# EAGLE board PIC32board (EAGLE 8.1.0)
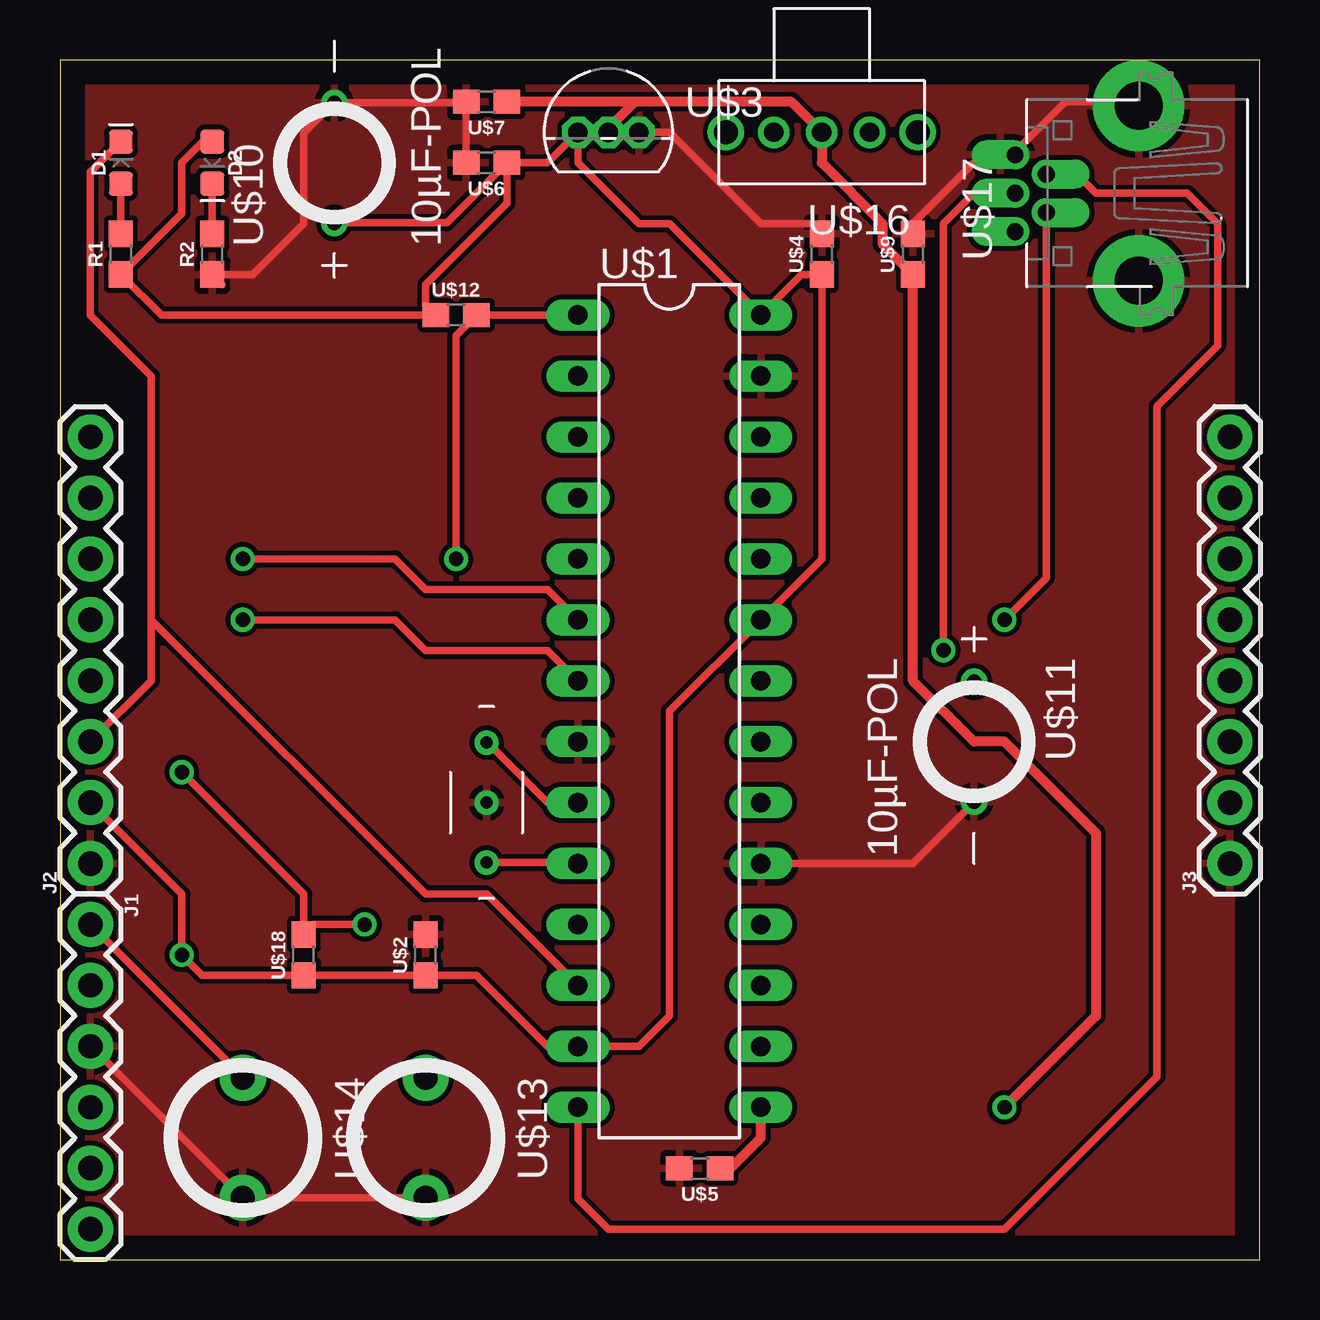
[diagram p0: board, top side]
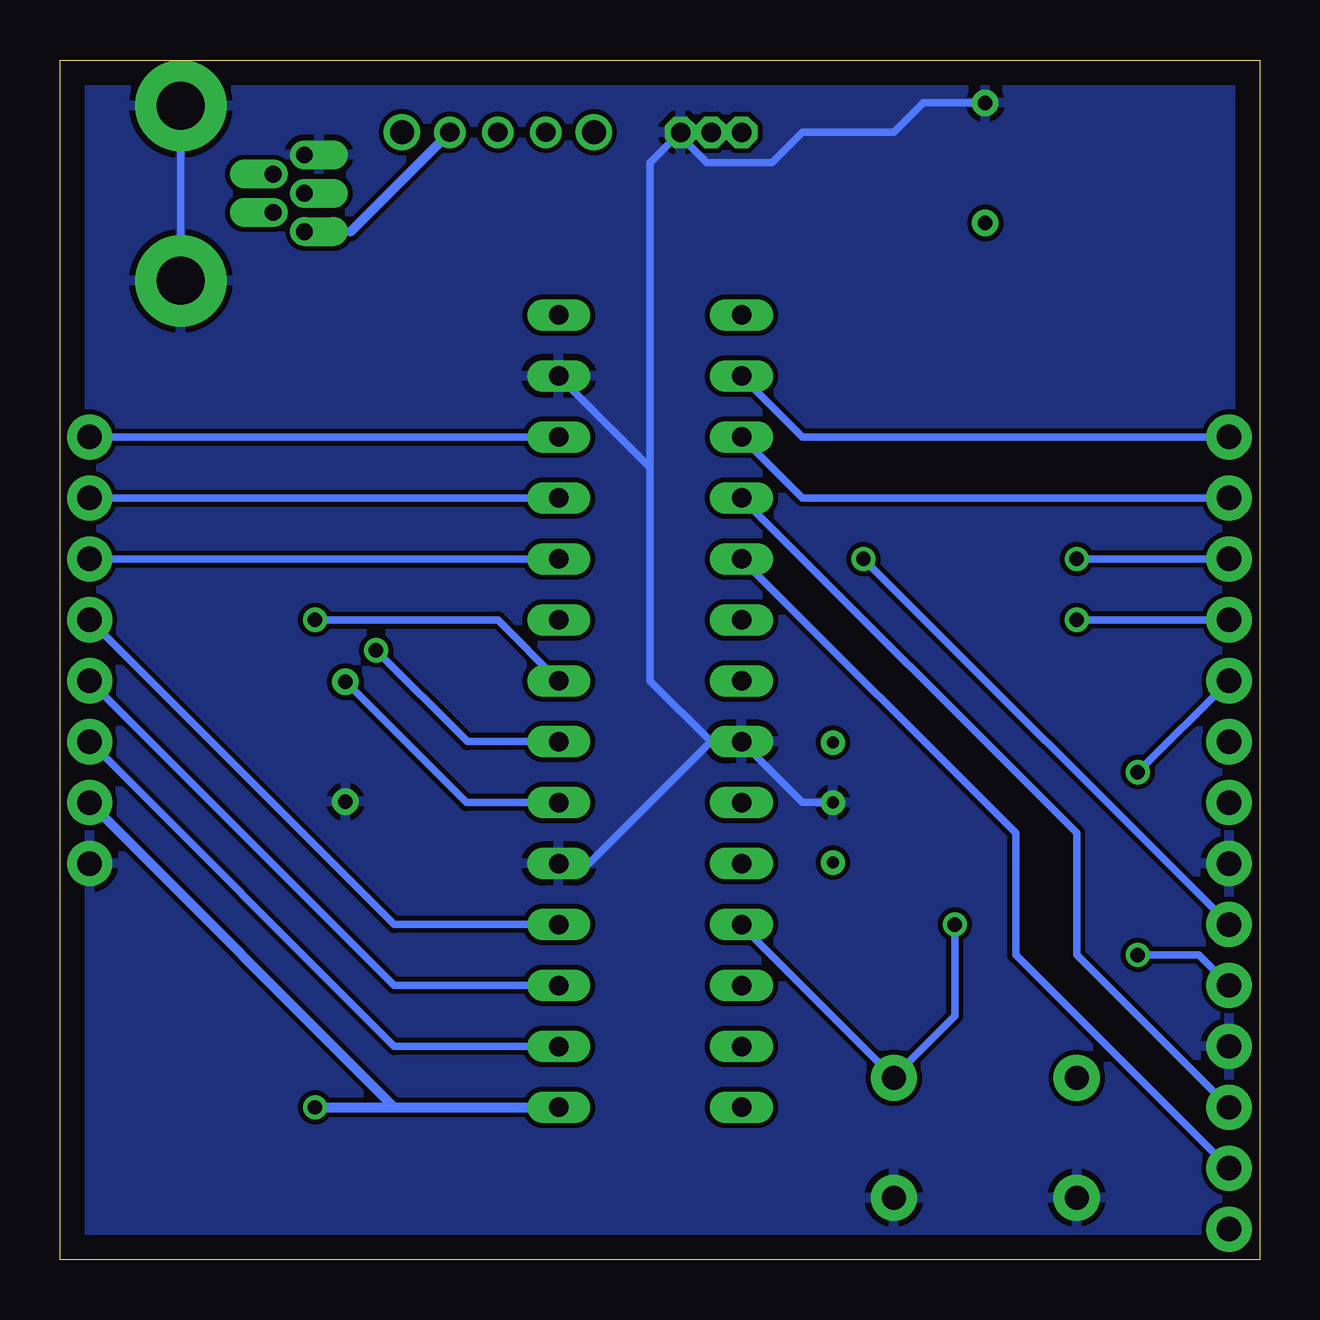
[diagram p1: board, bottom side, seen from below]

Size 50 x 50 mm. Coordinates in mm from the lower left corner, seen from the top.
Outline: 0,0 50,0 50,50 0,50 0,0
Copper layers (1*16): Top 0.035mm / dielectric 1.5mm / Bottom 0.035mm
Design rules "default": minimum track width 10mil, minimum drill 24mil, track to track 8mil, track to pad 8mil, pad to pad 8mil, via to via 8mil, smd to smd 8mil, copper to edge 40mil, drill to drill 8mil, minimum pad ring 10mil, minimum via ring 8mil, stop-mask expansion 4mil, vias tented up to drill 0mil, thermal gap 10mil

## Footprints (pad centres in the part's own frame; a part is rotated, then mirrored left to right if it is on the bottom)
LED-0603 = smd 1 x 1: A -0.877,0; C 0.877,0
1X06 = drill 1.016 pad 1.88: 1 0,0; 2 2.54,0; 3 5.08,0; 4 7.62,0; 5 10.16,0; 6 12.7,0
1X08 = drill 1.016 pad 1.88: 1 0,0; 2 2.54,0; 3 5.08,0; 4 7.62,0; 5 10.16,0; 6 12.7,0; 7 15.24,0; 8 17.78,0
0603 = smd 1.1 x 1: 1 -0.85,0; 2 0.85,0
DIP28 = drill 0.813 long: 1 -17.78,-3.81; 2 -15.24,-3.81; 3 -12.7,-3.81; 4 -10.16,-3.81; 5 -7.62,-3.81; 6 -5.08,-3.81; 7 -2.54,-3.81; 8 0,-3.81; 9 2.54,-3.81; 10 5.08,-3.81; 11 7.62,-3.81; 12 10.16,-3.81; 13 12.7,-3.81; 14 15.24,-3.81; 15 15.24,3.81; 16 12.7,3.81; 17 10.16,3.81; 18 7.62,3.81; 19 5.08,3.81; 20 2.54,3.81; 21 0,3.81; 22 -2.54,3.81; 23 -5.08,3.81; 24 -7.62,3.81; 25 -10.16,3.81; 26 -12.7,3.81; 27 -15.24,3.81; 28 -17.78,3.81
TO92 = drill 0.813 pad 1.016 octagon: 1 -1.27,0; 2 0,0; 3 1.27,0
8MHZ-CRYSTAL = drill 0.5: 1 -2.5,0; 2 0,0; 3 2.5,0
10µF_THROUGHHOLE = drill 0.6: NEG 2.5,0; POS -2.5,0
BTN = drill 1 pad 1.93: 1 -2.5,0; 2 2.5,0
SLIDE-SWITCH = drill 0.8: 1 -2,0; 2 2,0; 3 0,0 | drill 1: NC1 -4,0; NC2 4,0
USB-MINIB-THM-MOLEX = drill 0.7 offset: D+ 0,9.72; D- -0.8,8.42; GND 1.6,9.72; ID 0.8,8.42; VBUS -1.6,9.72 | drill 2 pad 3.81: GND1 -3.65,4.57; GND4 3.65,4.57

## Placement (x,y rotation side)
D1  GREEN  [LED-0603]  2.54,45.72 90 top
D2  RED  [LED-0603]  6.35,45.72 270 top
J1  [1X06]  1.27,13.97 270 top
J2  [1X08]  1.27,16.51 90 top
J3  [1X08]  48.77,16.51 90 top
R1  330  [0603]  2.54,41.91 90 top
R2  330  [0603]  6.35,41.91 90 top
U$1  PIC32MX250F128B_SOCKET  [DIP28]  25.4,21.59 270 top
U$2  0.1µF-SMD  [0603]  15.24,12.7 90 top
U$3  MCP1702  [TO92]  22.86,46.99 0 top
U$4  0.1µF-SMD  [0603]  31.75,41.91 90 top
U$5  0.1µF-SMD  [0603]  26.67,3.81 180 top
U$6  0.1µF-SMD  [0603]  17.78,45.72 180 top
U$7  0.1µF-SMD  [0603]  17.78,48.26 180 top
U$8  8MHZ-CRYSTAL  [8MHZ-CRYSTAL]  17.78,19.05 270 top
U$9  0.1µF-SMD  [0603]  35.56,41.91 90 top
U$10  10µF-POL  [10µF_THROUGHHOLE]  11.43,45.72 90 top
U$11  10µF-POL  [10µF_THROUGHHOLE]  38.1,21.59 270 top
U$12  10KOHM-SMD  [0603]  16.51,39.37 0 top
U$13  BTN  [BTN]  15.24,5.08 270 top
U$14  BTN  [BTN]  7.62,5.08 270 top
U$16  SLIDE-SWITCH  [SLIDE-SWITCH]  31.75,46.99 180 top
U$17  USB-B  [USB-MINIB-THM-MOLEX]  49.53,44.45 90 top
U$18  10KOHM-SMD  [0603]  10.16,12.7 90 top

## Library data of the parts
D1 = me433; PROD_ID: DIO-00821
D2 = me433; PROD_ID: DIO-00819
J1 = me433; PROD_ID: CONN-08437
J2 J3 = me433; PROD_ID: CONN-08438
R1 R2 = me433; PROD_ID: RES-00818
U$1-U$14 U$16-U$18 = me433

## Nets
5V: J3.2 U$1.15 U$3.2 U$5.1 U$7.1 U$9.1 U$16.3
A0: J2.8 U$1.2
A1: J2.7 U$1.3
A4: D1.C J2.3 U$1.12
B2: J2.6 U$1.6
B3: J2.5 U$1.7
B4: J2.4 U$1.11 U$13.1 U$18.2
B7: J3.3 U$1.16
B8: J3.4 U$1.17
B9: J3.5 U$1.18
B13: J3.6 U$1.24
B14: J3.7 U$1.25
B15: J3.8 U$1.26
D+: U$1.21 U$17.D+
D-: U$1.22 U$17.D-
GND: J1.3 J2.1 J3.1 R2.1 U$1.8 U$1.19 U$1.27 U$2.2 U$3.3 U$4.2 U$5.2 U$6.2 U$7.2 U$8.2 U$9.2 U$10.NEG U$11.NEG U$13.2 U$14.2 U$17.GND U$17.GND1 U$17.GND4
ID: U$1.14 U$17.ID
MCLR: J1.1 U$1.1 U$12.2 U$14.1
N$1: D2.C R2.2
N$2: D1.A R1.2
NC3: J1.6
OSC1: U$1.9 U$8.1
OSC2: U$1.10 U$8.3
PGEC1: J1.5 U$1.5
PGED1: J1.4 U$1.4
VBUS: U$16.1 U$17.VBUS
VCAP: U$1.20 U$11.POS
VDD: D2.A J1.2 J2.2 R1.1 U$1.13 U$1.23 U$1.28 U$2.1 U$3.1 U$4.1 U$6.1 U$10.POS U$12.1 U$18.1

## Tracks (layer width: path | path; a pad name or v marks a point on that pad's centre or on a via)
5V  (via drill 0.6)
  Top 0.305: U$5.1 27.94,3.81 | 23.11,47.41 23.11,47.24
  Top 0.406: 27.94,3.81 29.21,5.08 U$1.15 | U$3.2 23.11,47.24 | 23.96,48.26 30.48,48.26 U$16.3 31.75,45.72 34.29,43.18 34.29,42.33 U$9.1 35.56,24.13 38.1,21.59 39.37,21.59 43.18,17.78 43.18,10.16 v39.37,6.35 | 23.96,48.26 23.11,47.41 | 23.96,48.26 U$7.1
  Bottom 0.406: 36.07,6.35 U$1.15 | 36.07,6.35 J3.2 | v39.37,6.35 36.07,6.35
A0
  Bottom 0.305: J2.8 19.05,34.29 U$1.2
A1
  Bottom 0.305: J2.7 19.05,31.75 U$1.3
A4
  Top 0.305: 3.81,26.67 3.81,36.83 1.27,39.37 1.27,45.33 D1.C | 3.81,26.67 3.81,24.13 J2.3 | U$1.12 17.78,15.24 15.24,15.24 3.81,26.67
B2  (via drill 0.6)
  Top 0.305: v7.62,29.21 13.97,29.21 15.24,27.94 20.32,27.94 U$1.6
  Bottom 0.305: J2.6 v7.62,29.21
B3  (via drill 0.6)
  Top 0.305: v7.62,26.67 13.97,26.67 15.24,25.4 20.32,25.4 U$1.7
  Bottom 0.305: J2.5 v7.62,26.67
B4  (via drill 0.6)
  Top 0.305: v12.7,13.97 10.58,13.97 U$18.2 10.16,15.24 v5.08,20.32
  Bottom 0.305: U$1.11 21.59,13.93 U$13.1 15.24,7.62 12.7,10.16 v12.7,13.97 | v5.08,20.32 J2.4
B7
  Bottom 0.305: U$1.16 36.07,8.89 J3.3
B8
  Bottom 0.305: U$1.17 36.07,11.43 J3.4
B9
  Bottom 0.305: U$1.18 36.07,13.97 J3.5
B13
  Bottom 0.305: J3.6 U$1.24
B14
  Bottom 0.305: J3.7 U$1.25
B15
  Bottom 0.305: J3.8 U$1.26
D+  (via drill 0.6)
  Top 0.305: U$17.D+ 38.1,44.45 36.83,43.18 v36.83,25.4
  Bottom 0.305: U$1.21 33.02,21.59 v36.83,25.4
D-  (via drill 0.6)
  Top 0.305: U$17.D- 41.11,28.41 v39.37,26.67
  Bottom 0.305: v39.37,26.67 31.75,26.67 U$1.22
GND
  Top 0.305: U$11.NEG 38.1,19.05 35.56,16.51 U$1.19 | 6.77,40.64 R2.1 8.04,41.06 10.16,43.18 10.16,46.95 U$10.NEG 16.89,48.22 U$7.2 U$6.2 | J1.3 1.31,8.89 U$14.2 U$13.2 | U$9.2 35.56,43.18 38.43,46.05 U$17.GND 39.81,46.16 41.91,48.26 44.8,48.26 U$17.GND4 | U$3.3 25.4,46.99 29.21,43.18 31.33,43.18 U$4.2
  Bottom 0.305: U$8.2 19.05,19.05 U$1.8 | U$10.NEG 14.01,48.22 15.24,46.99 19.05,46.99 20.32,45.72 23.03,45.72 23.88,46.57 23.88,46.74 U$3.3 25.4,45.72 25.4,33.02 | U$17.GND1 U$17.GND4 | U$1.19 27.94,16.51 22.86,21.59 | 22.86,21.59 U$1.8 | U$1.8 22.86,21.59 | 22.86,21.59 25.4,24.13 25.4,33.02 | 25.4,33.02 U$1.27
  pour Top: 0,50.8 50.8,50.8 50.8,0 0,0
  pour Bottom: 0,50.8 50.8,50.8 50.8,0 0,0
ID
  Top 0.305: U$17.ID 42.38,45.25 43.18,44.45 46.99,44.45 48.26,43.18 48.26,38.1 45.72,35.56 45.72,7.62 39.37,1.27 22.86,1.27 21.59,2.54 U$1.14
MCLR  (via drill 0.6)
  Top 0.305: U$1.1 U$12.2 16.51,38.52 v16.51,29.21 | U$14.1 7.62,7.62 J1.1
  Bottom 0.305: J1.1 v16.51,29.21
N$1
  Top 0.305: D2.C R2.2
N$2
  Top 0.305: D1.A R1.2
OSC1
  Top 0.305: U$8.1 17.82,21.55 20.32,19.05 U$1.9
OSC2
  Top 0.305: U$8.3 21.55,16.55 U$1.10
PGEC1
  Bottom 0.305: J1.5 10.16,12.7 10.16,17.78 U$1.5
PGED1
  Bottom 0.305: J1.4 7.62,12.7 7.62,17.78 U$1.4
VBUS
  Bottom 0.305: U$17.VBUS 37.89,42.85
  Bottom 0.406: 37.89,42.85 U$16.1
VCAP
  Bottom 0.305: U$1.20 33.06,19.05 U$11.POS
VDD  (via drill 0.6)
  Top 0.305: U$6.1 18.63,44.03 15.24,40.64 15.24,39.79 U$12.1 4.23,39.37 R1.1 5.08,43.6 5.08,45.72 5.96,46.6 D2.A | U$6.1 20.32,45.72 U$3.1 21.59,45.72 24.13,43.18 25.4,43.18 U$1.28 30.9,41.06 U$4.1 31.75,29.21 U$1.23 25.4,22.86 25.4,10.16 24.13,8.89 U$1.13 20.32,8.89 17.36,11.85 U$2.1 U$18.1 5.93,11.85 v5.08,12.7 5.08,15.24 J2.2 | U$10.POS 16.13,43.22 U$6.1
  Bottom 0.305: v5.08,12.7 2.54,12.7 J1.2